# Altium PCB bootloader.PcbDoc
Units mm, origin at the board's own origin, x right, y up, seen from the top; angles counter-clockwise.
Board outline 152.4 x 101.6 mm, 2 copper layers (Top Layer, Bottom Layer); 40 components, 8 nets, 204 pads, 0 vias.
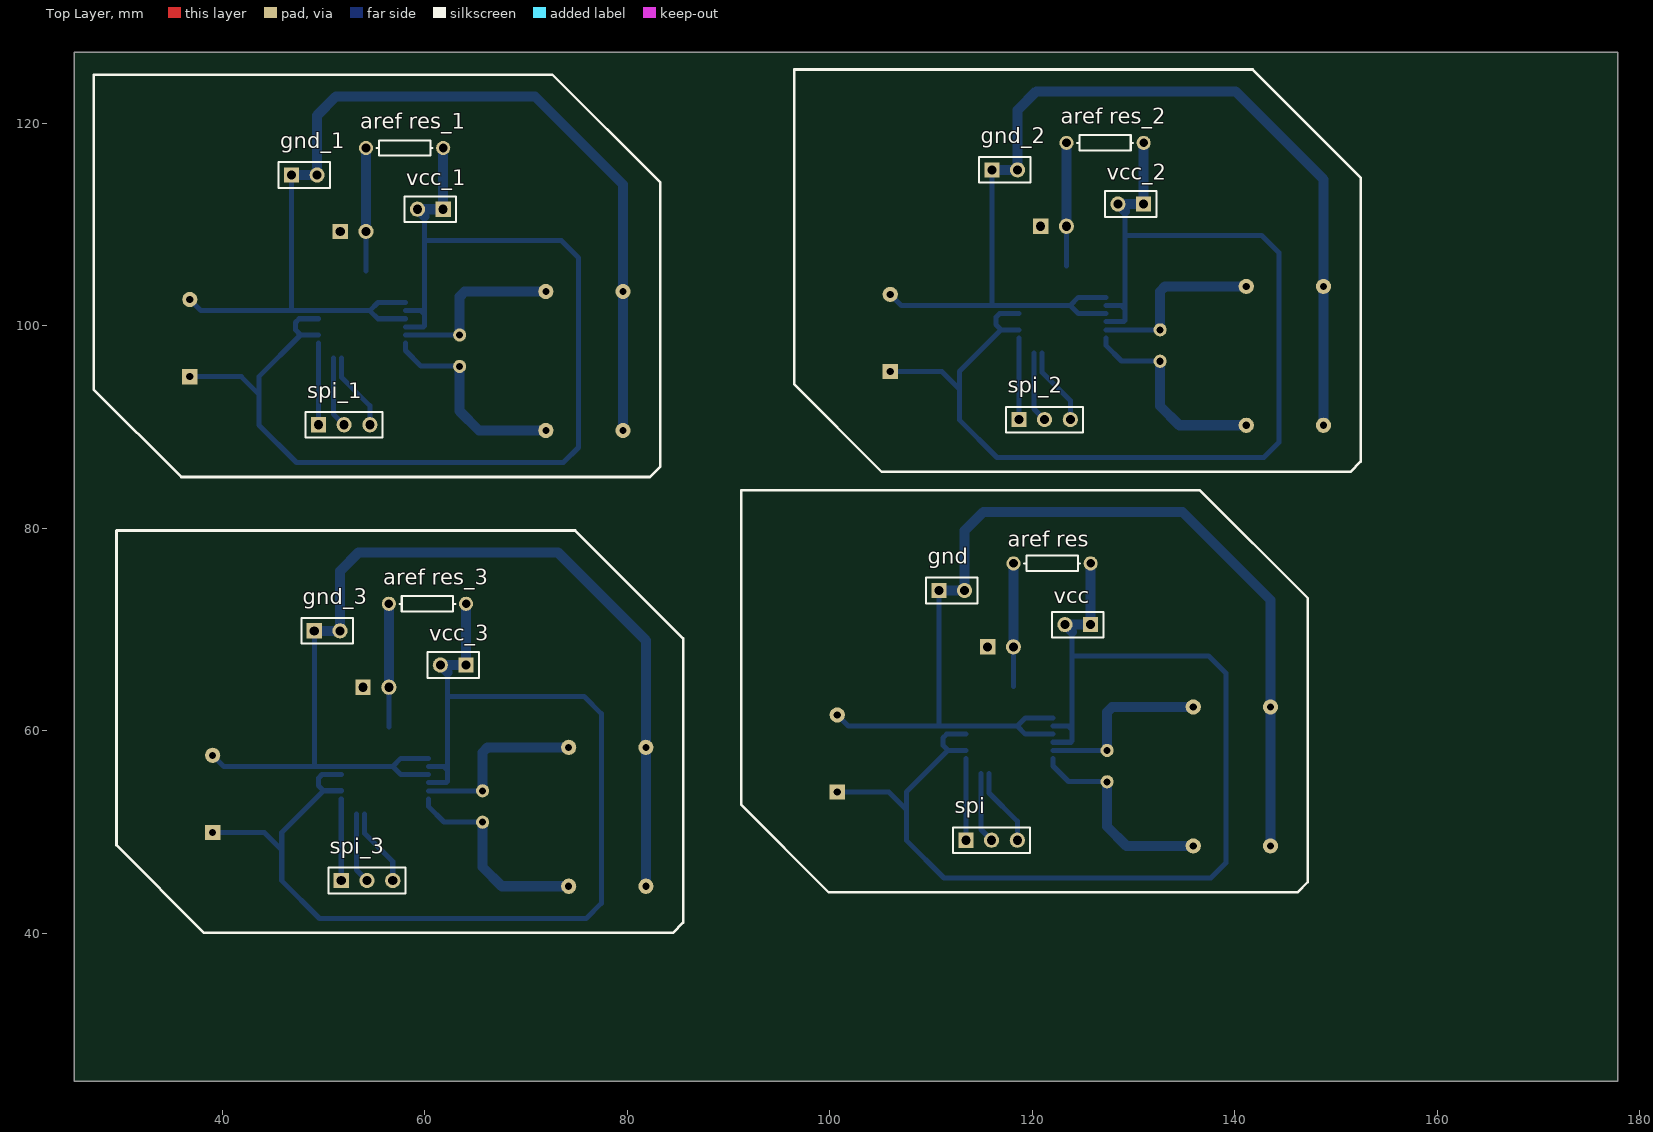
[diagram p0: Top Layer view]
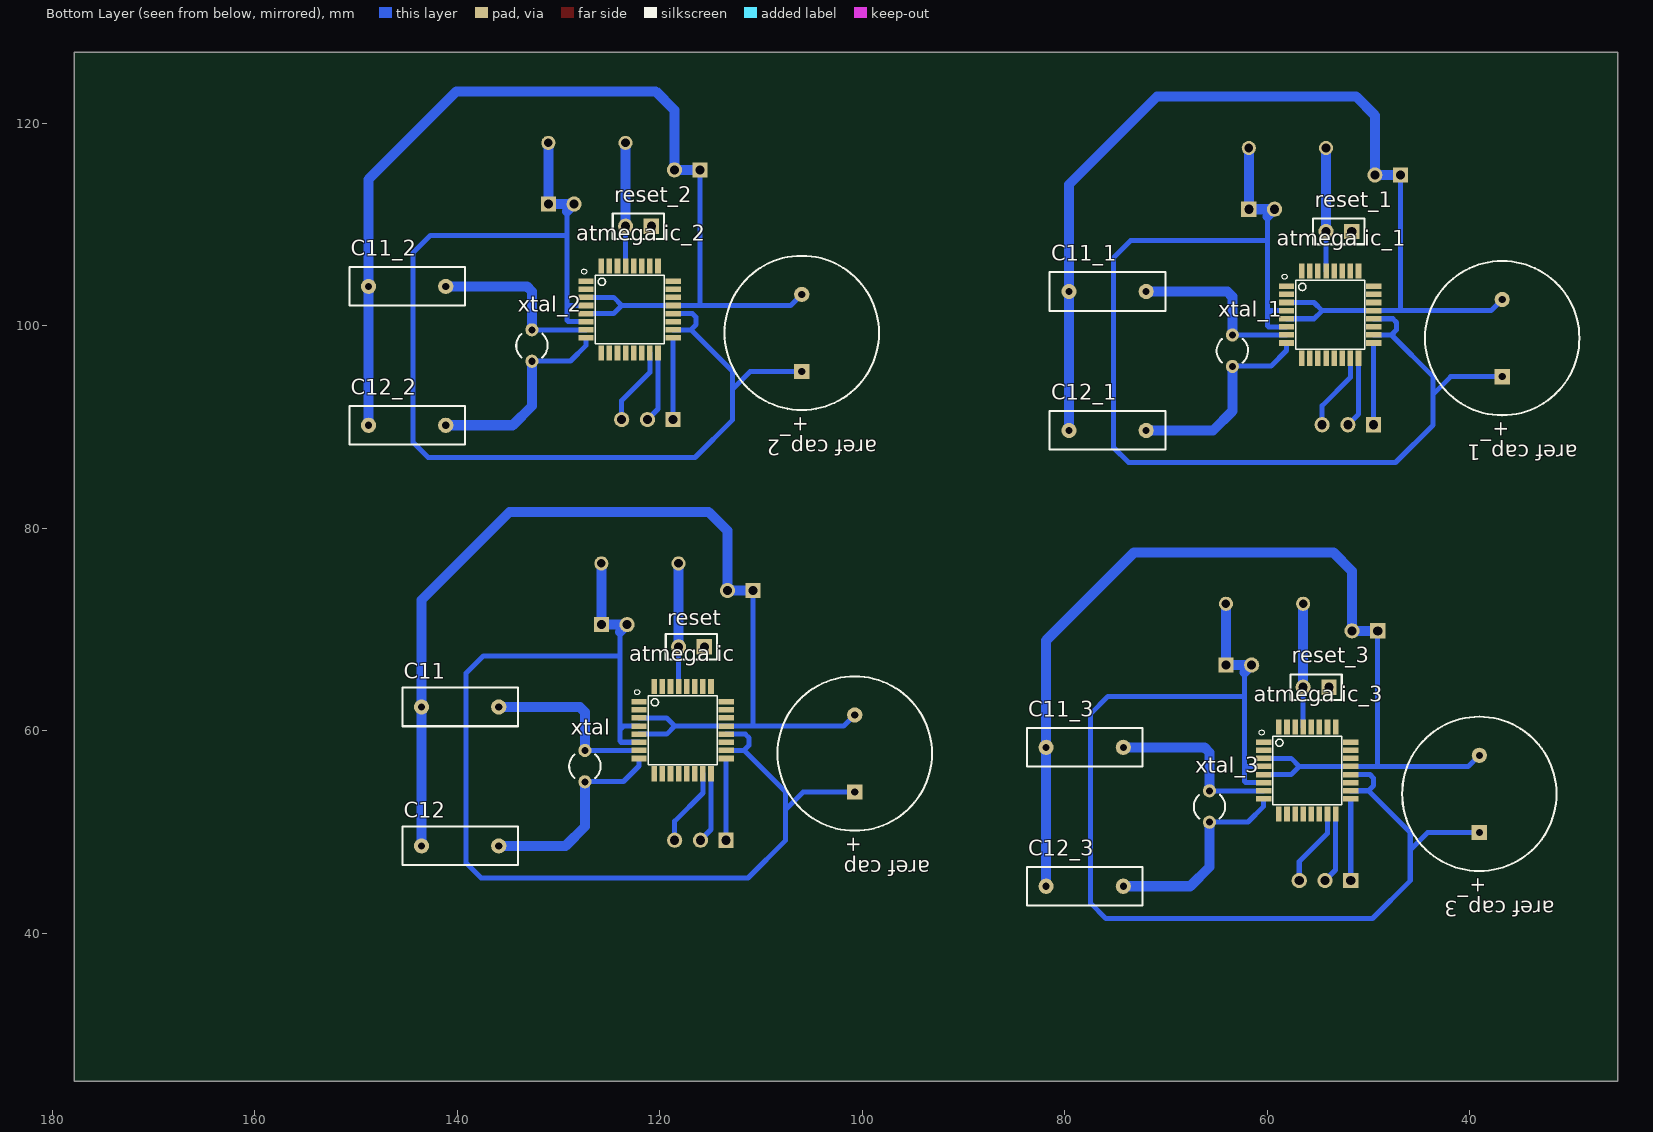
[diagram p1: Bottom Layer view, seen from below]

## Layer stack, top to bottom
Top Solder: solder mask 0.0102, Solder Resist, Dk 3.5
Top Layer: signal copper 0.0356
Dielectric 1: dielectric 0.32, FR-4, Dk 4.8
Bottom Layer: signal copper 0.0356
Bottom Solder: solder mask 0.0102, Solder Resist, Dk 3.5

## Board outline
25.4,25.4 177.8,25.4 177.8,127 25.4,127

## Design rules (kind name [scope] priority, off if disabled: settings)
Clearance Clearance_1 [All] p1: gap=0 ignorepadtopadclearanceinfootprint=FALSE
Clearance [All] p2: gap=3 ignorepadtopadclearanceinfootprint=FALSE
PolygonConnect [All] p1: connectstyle=Relief reliefconductorwidth=0.254 reliefentries=4 polygonreliefangle="90 Angle" airgapwidth=0.254
RoomDefinition bootloader [InComponentClass('bootloader')] p1: confinementstyle=ConfineIn formatcopy=TRUE lockcomponents=FALSE outline 178.943,26.924 244.729,26.924 244.729,45.72 178.943,45.72
RoutingVias [All] p1: holewidth=0.711 width=1.27 viastyle="Through Hole" minholewidth=0.711 minwidth=1.27 maxholewidth=0.711 maxwidth=1.27
SolderMaskExpansion [All] p1: expansion=0.102
Width [All] p1: maxlimit=0.254 minlimit=0.254 preferedwidth=0.254
30 further rules are at their usual default settings.

## Classes and differential pairs
component class bootloader: "aref res" C11 C12 gnd reset spi vcc xtal

## Components (designator, comment, footprint, x,y, rotation, side; value= is the part's Value field where it differs from the comment)
"aref cap" "Cap Pol1" RB7.6-15 100.736,57.76 r270 bottom value=47uf
"aref cap_1" "Cap Pol1" RB7.6-15 36.805,98.781 r270 bottom value=47uf (schematic designator "aref cap")
"aref cap_2" "Cap Pol1" RB7.6-15 105.969,99.289 r270 bottom value=47uf (schematic designator "aref cap")
"aref cap_3" "Cap Pol1" RB7.6-15 39.065,53.772 r270 bottom value=47uf (schematic designator "aref cap")
"aref res" "Res1" AXIAL-0.3 121.945,76.53 r180 top value="120 ohm"
"aref res_1" "Res1" AXIAL-0.3 58.014,117.551 r180 top value="120 ohm" (schematic designator "aref res")
"aref res_2" "Res1" AXIAL-0.3 127.178,118.059 r180 top value="120 ohm" (schematic designator "aref res")
"aref res_3" "Res1" AXIAL-0.3 60.274,72.542 r180 top value="120 ohm" (schematic designator "aref res")
"atmega ic" "ATMEGA328P-AU" *QFP80P900X900X120-32N 117.729,60.071 r180 bottom
"atmega ic_1" "ATMEGA328P-AU" *QFP80P900X900X120-32N 53.797,101.092 r180 bottom (schematic designator "atmega ic")
"atmega ic_2" "ATMEGA328P-AU" *QFP80P900X900X120-32N 122.961,101.6 r180 bottom (schematic designator "atmega ic")
"atmega ic_3" "ATMEGA328P-AU" *QFP80P900X900X120-32N 56.058,56.083 r180 bottom (schematic designator "atmega ic")
C11 "Cap" RAD-0.3 139.7,62.357 r180 bottom value=22pf
C11_1 "Cap" RAD-0.3 75.768,103.378 r180 bottom value=22pf (schematic designator C11)
C11_2 "Cap" RAD-0.3 144.932,103.886 r180 bottom value=22pf (schematic designator C11)
C11_3 "Cap" RAD-0.3 78.029,58.369 r180 bottom value=22pf (schematic designator C11)
C12 "Cap" RAD-0.3 139.7,48.641 r180 bottom value=22pf
C12_1 "Cap" RAD-0.3 75.768,89.662 r180 bottom value=22pf (schematic designator C12)
C12_2 "Cap" RAD-0.3 144.932,90.17 r180 bottom value=22pf (schematic designator C12)
C12_3 "Cap" RAD-0.3 78.029,44.653 r180 bottom value=22pf (schematic designator C12)
gnd "Header 2" HDR1X2 110.769,73.863 r0 top
gnd_1 "Header 2" HDR1X2 46.838,114.884 r0 top (schematic designator gnd)
gnd_2 "Header 2" HDR1X2 116.002,115.392 r0 top (schematic designator gnd)
gnd_3 "Header 2" HDR1X2 49.098,69.875 r0 top (schematic designator gnd)
reset "Header 2" HDR1X2 115.589,68.294 r0 bottom
reset_1 "Header 2" HDR1X2 51.657,109.315 r0 bottom (schematic designator reset)
reset_2 "Header 2" HDR1X2 120.821,109.823 r0 bottom (schematic designator reset)
reset_3 "Header 2" HDR1X2 53.918,64.306 r0 bottom (schematic designator reset)
spi "Header 3" HDR1X3 113.436,49.2 r0 top
spi_1 "Header 3" HDR1X3 49.505,90.221 r0 top (schematic designator spi)
spi_2 "Header 3" HDR1X3 118.669,90.729 r0 top (schematic designator spi)
spi_3 "Header 3" HDR1X3 51.765,45.212 r0 top (schematic designator spi)
vcc "+5v" HDR1X2 125.755,70.485 r180 top
vcc_1 "+5v" HDR1X2 61.824,111.506 r180 top (schematic designator vcc)
vcc_2 "+5v" HDR1X2 130.988,112.014 r180 top (schematic designator vcc)
vcc_3 "+5v" HDR1X2 64.084,66.497 r180 top (schematic designator vcc)
xtal "XTAL" R38 127.381,56.515 r180 bottom
xtal_1 "XTAL" R38 63.449,97.536 r180 bottom (schematic designator xtal)
xtal_2 "XTAL" R38 132.613,98.044 r180 bottom (schematic designator xtal)
xtal_3 "XTAL" R38 65.71,52.527 r180 bottom (schematic designator xtal)

## Footprints (in the part's own frame and the unit in brackets; to place one, negate y for a bottom-side part, rotate by r counter-clockwise, add the part's x,y. Pads: shape width x height; smd on the part's side, far side on the other; paste and mask are expansions set on the pad)
*QFP80P900X900X120-32N [mm]
  rect 1.5x0.55 smd: 1(-4.3,2.8) 2(-4.3,2) 3(-4.3,1.2) 4(-4.3,0.4) 5(-4.3,-0.4) 6(-4.3,-1.2) 7(-4.3,-2) 8(-4.3,-2.8) 17(4.3,-2.8) 18(4.3,-2) 19(4.3,-1.2) 20(4.3,-0.4) 21(4.3,0.4) 22(4.3,1.2) 23(4.3,2) 24(4.3,2.8)
  rect 0.55x1.5 smd: 9(-2.8,-4.3) 10(-2,-4.3) 11(-1.2,-4.3) 12(-0.4,-4.3) 13(0.4,-4.3) 14(1.2,-4.3) 15(2,-4.3) 16(2.8,-4.3) 25(2.8,4.3) 26(2,4.3) 27(1.2,4.3) 28(0.4,4.3) 29(-0.4,4.3) 30(-1.2,4.3) 31(-2,4.3) 32(-2.8,4.3)
  silkscreen extent -4.75,-3.4 3.4,4
AXIAL-0.3 [mm] "Axial Device, Thru-Hole; 2 Leads; 0.3 in Pin Spacing"
  round 1.4 hole 0.85: 1(-3.81,0) 2(3.81,0)
  silkscreen extent -2.77,-0.76 2.77,0.76
HDR1X2 [mm] "Connector; Header; 2 Position"
  rect 1.5x1.5 hole 0.9: 1(0,0)
  round 1.5 hole 0.9: 2(2.54,0)
  silkscreen extent -1.27,-1.27 3.81,1.27
HDR1X3 [mm] "Connector; Header; 3 Position"
  rect 1.5x1.5 hole 0.9: 1(0,0)
  round 1.5 hole 0.9: 2(2.54,0) 3(5.08,0)
  silkscreen extent -1.27,-1.27 6.35,1.27
R38 [mm] "Crystal, Thru-Hole; 2 Leads; Body 3.1 x 8.2 mm (Dia.xH)"
  round 1.3 hole 0.7: 1(0,1.55) 2(0,-1.55)
  silkscreen extent -1.55,-1.19 1.55,1.17
RAD-0.3 [mm] "Radial Cap, Thru-Hole; 2 Leads; 0.3 in Pin Spacing"
  round 1.5 hole 0.7: 1(-3.81,0) 2(3.81,0)
  silkscreen extent -5.71,-1.91 5.71,1.91
RB7.6-15 [mm] "Polarized Capacitor (Radial); 2 Leads"
  rect 1.5x1.5 hole 0.7: 1(3.81,0)
  round 1.5 hole 0.7: 2(-3.81,0)
  silkscreen extent -7.62,-7.62 7.62,7.62

## Part data
"aref cap" "aref cap_1" "aref cap_2" "aref cap_3": "Polarized Capacitor (Radial)", LatestRevisionDate=17-Jul-2002, LatestRevisionNote="Re-released for DXP Platform.", PackageDescription="Polarized Capacitor (Radial); 2 Leads", PackageReference=RB7.6-15, Published=8-Jun-2000, Publisher="Altium Limited"
"aref res" "aref res_1" "aref res_2" "aref res_3": "Resistor", LatestRevisionDate=17-Jul-2002, LatestRevisionNote="Re-released for DXP Platform.", PackageDescription="Axial Device, Thru-Hole; 2 Leads; 0.3 in Pin Spacing", PackageReference=AXIAL-0.3, Published=8-Jun-2000, Publisher="Altium Limited"
"atmega ic" "atmega ic_1" "atmega ic_2" "atmega ic_3": "Microcontroller Mcu, 8 Bit, Atmega, 20mhz, Tqfp-32", Package="TQFP-32 Microchip", Digi-Key_Part_Number=ATMEGA328P-AU-ND, Digi-Key_Purchase_URL=https://www.digikey.com/product-detail/en/microchip-technology/ATMEGA328P-AU/ATMEGA328P-AU-ND/1832260?utm_source=snapeda&utm_medium=aggregator&utm_campaign=symbol, MF=Microchip, MP=ATMEGA328P-AU, SnapEDA_Link=https://www.snapeda.com/parts/ATMEGA328P-AU/Microchip/view-part/?ref=snap
C11 C11_1 C11_2 C11_3 C12 C12_1 C12_2 C12_3: "Capacitor", LatestRevisionDate=17-Jul-2002, LatestRevisionNote="Re-released for DXP Platform.", PackageDescription="Radial Cap, Thru-Hole; 2 Leads; 0.3 in Pin Spacing", PackageReference=RAD-0.3, Published=8-Jun-2000, Publisher="Altium Limited"
gnd gnd_1 gnd_2 gnd_3 reset reset_1 reset_2 reset_3: "Header, 2-Pin", LatestRevisionDate=17-Jul-2002, LatestRevisionNote="Re-released for DXP Platform.", Publisher="Altium Limited"
spi spi_1 spi_2 spi_3: "Header, 3-Pin", LatestRevisionDate=17-Jul-2002, LatestRevisionNote="Re-released for DXP Platform.", Publisher="Altium Limited"
vcc vcc_1 vcc_2 vcc_3: library part "Header 2", "Header, 2-Pin", LatestRevisionDate=17-Jul-2002, LatestRevisionNote="Re-released for DXP Platform.", Publisher="Altium Limited"
xtal xtal_1 xtal_2 xtal_3: "Crystal Oscillator", LatestRevisionDate=17-Jul-2002, LatestRevisionNote="Re-released for DXP Platform.", PackageDescription="Crystal, Thru-Hole; 2 Leads; Body 3.1 x 8.2 mm (Dia.xH)", PackageReference=R38, Published=8-Jun-2000, Publisher="Altium Limited"

## Nets (pads, with @x,y where several pads share a name; then routed paths per layer and width w, separated by ;. In a path a pad name is that pad's centre, name@x,y a point inside that pad or via, vN(x,y) a via of type N, cw(c..) or ccw(c..) an arc to the next point about the centre after c; other vN are vias at no path point)
"Netaref cap_1": "aref cap.1" "aref res.1" "atmega ic.4" "atmega ic.6" "atmega ic.18" "atmega ic.20" vcc.1 vcc.2 | length 116.5
  Bottom Layer w0.254: 122.029,58.871 122.035,58.877 ; 123.819,58.871 123.927,58.979
  Bottom Layer w0.5: 100.736,53.95 105.829,53.95 107.556,52.222 ; 113.429,58.071 111.677,58.071 ; 113.429,59.671 111.538,59.671 111.176,59.309 111.176,58.572 111.677,58.071 ; 122.029,58.871 123.819,58.871 ; 122.029,60.471 123.552,60.471 123.927,60.096 ; 123.927,58.979 123.927,60.096 ; 123.927,69.774 123.927,67.386 ; 107.556,52.222 107.556,49.188 111.277,45.466 137.617,45.466 139.116,46.965 139.116,65.684 137.414,67.386 123.927,67.386 ; 107.556,52.222 107.556,53.95 111.677,58.071 ; 123.927,60.096 123.927,67.386
  Bottom Layer w1: 123.927,69.774 vcc.2 vcc.1 125.755,76.53
"Netaref cap_2": "aref cap.2" "atmega ic.3" "atmega ic.5" "atmega ic.21" C11.1 C12.1 gnd.1 gnd.2 | length 106.7
  Bottom Layer w0.254: 110.769,60.439 110.769,60.471 ; 122.029,61.271 122.099,61.341
  Bottom Layer w0.5: 100.736,61.57 101.835,60.471 110.769,60.471 ; gnd.1 110.769,60.471 ; 122.029,59.671 119.31,59.671 118.51,60.471 ; 122.029,61.271 119.31,61.271 118.51,60.471 ; 110.769,60.471 113.429,60.471 118.51,60.471
  Bottom Layer w1: gnd.1 gnd.2 113.309,79.756 115.164,81.61 134.823,81.61 143.51,72.923 C11.1 C12.1
"Netaref res_2": "aref res.2" "atmega ic.29" reset.2 | length 12.3
  Bottom Layer w0.254: reset.2 reset.2@118.135,68.301 ; 118.135,76.886 118.212,76.81
  Bottom Layer w0.5: 118.129,64.371 reset.2
  Bottom Layer w1: reset.2@118.135,68.301 118.135,76.53
"Netatmega ic_7": "atmega ic.7" C11.2 xtal.1 | length 17.9
  Bottom Layer w0.254: 122.029,58.071 122.035,58.065
  Bottom Layer w0.5: 122.035,58.065 xtal.1
  Bottom Layer w1: xtal.1 127.381,61.849 127.889,62.357 C11.2
"Netatmega ic_8": "atmega ic.8" C12.2 xtal.2 | length 20.5
  Bottom Layer w0.254: xtal.2@127.355,54.991 xtal.2
  Bottom Layer w0.5: 122.029,57.271 122.029,56.533 123.571,54.991 xtal.2@127.355,54.991
  Bottom Layer w1: xtal.2 127.381,50.546 129.286,48.641 C12.2
"Netatmega ic_15": "atmega ic.15" spi.3 | length 7.7
  Bottom Layer w0.5: 115.729,55.771 115.729,53.867 118.516,51.079 spi.3
"Netatmega ic_16": "atmega ic.16" spi.2 | length 7
  Bottom Layer w0.5: 114.929,55.771 114.929,50.247 spi.2
"Netatmega ic_17": "atmega ic.17" spi.1 | length 8.1
  Bottom Layer w0.254: spi.1@113.429,49.207 spi.1
  Bottom Layer w0.5: spi.1@113.429,49.207 113.429,57.271
pads on no net: "aref cap_1.1" "aref cap_1.2" "aref cap_2.1" "aref cap_2.2" "aref cap_3.1" "aref cap_3.2" "aref res_1.1" "aref res_1.2" "aref res_2.1" "aref res_2.2" "aref res_3.1" "aref res_3.2" "atmega ic.1" "atmega ic.2" "atmega ic.9" "atmega ic.10" "atmega ic.11" "atmega ic.12" "atmega ic.13" "atmega ic.14" "atmega ic.19" "atmega ic.22" "atmega ic.23" "atmega ic.24" "atmega ic.25" "atmega ic.26" "atmega ic.27" "atmega ic.28" "atmega ic.30" "atmega ic.31" "atmega ic.32" "atmega ic_1.1" "atmega ic_1.2" "atmega ic_1.3" "atmega ic_1.4" "atmega ic_1.5" "atmega ic_1.6" "atmega ic_1.7" "atmega ic_1.8" "atmega ic_1.9" "atmega ic_1.10" "atmega ic_1.11" "atmega ic_1.12" "atmega ic_1.13" "atmega ic_1.14" "atmega ic_1.15" "atmega ic_1.16" "atmega ic_1.17" "atmega ic_1.18" "atmega ic_1.19" "atmega ic_1.20" "atmega ic_1.21" "atmega ic_1.22" "atmega ic_1.23" "atmega ic_1.24" "atmega ic_1.25" "atmega ic_1.26" "atmega ic_1.27" "atmega ic_1.28" "atmega ic_1.29" "atmega ic_1.30" "atmega ic_1.31" "atmega ic_1.32" "atmega ic_2.1" "atmega ic_2.2" "atmega ic_2.3" "atmega ic_2.4" "atmega ic_2.5" "atmega ic_2.6" "atmega ic_2.7" "atmega ic_2.8" "atmega ic_2.9" "atmega ic_2.10" "atmega ic_2.11" "atmega ic_2.12" "atmega ic_2.13" "atmega ic_2.14" "atmega ic_2.15" "atmega ic_2.16" "atmega ic_2.17" "atmega ic_2.18" "atmega ic_2.19" "atmega ic_2.20" "atmega ic_2.21" "atmega ic_2.22" "atmega ic_2.23" "atmega ic_2.24" "atmega ic_2.25" "atmega ic_2.26" "atmega ic_2.27" "atmega ic_2.28" "atmega ic_2.29" "atmega ic_2.30" "atmega ic_2.31" "atmega ic_2.32" "atmega ic_3.1" "atmega ic_3.2" "atmega ic_3.3" "atmega ic_3.4" "atmega ic_3.5" "atmega ic_3.6" "atmega ic_3.7" "atmega ic_3.8" "atmega ic_3.9" "atmega ic_3.10" "atmega ic_3.11" "atmega ic_3.12" "atmega ic_3.13" "atmega ic_3.14" "atmega ic_3.15" "atmega ic_3.16" "atmega ic_3.17" "atmega ic_3.18" "atmega ic_3.19" "atmega ic_3.20" "atmega ic_3.21" "atmega ic_3.22" "atmega ic_3.23" "atmega ic_3.24" "atmega ic_3.25" "atmega ic_3.26" "atmega ic_3.27" "atmega ic_3.28" "atmega ic_3.29" "atmega ic_3.30" "atmega ic_3.31" "atmega ic_3.32" C11_1.1 C11_1.2 C11_2.1 C11_2.2 C11_3.1 C11_3.2 C12_1.1 C12_1.2 C12_2.1 C12_2.2 C12_3.1 C12_3.2 gnd_1.1 gnd_1.2 gnd_2.1 gnd_2.2 gnd_3.1 gnd_3.2 reset.1 reset_1.1 reset_1.2 reset_2.1 reset_2.2 reset_3.1 reset_3.2 spi_1.1 spi_1.2 spi_1.3 spi_2.1 spi_2.2 spi_2.3 spi_3.1 spi_3.2 spi_3.3 vcc_1.1 vcc_1.2 vcc_2.1 vcc_2.2 vcc_3.1 vcc_3.2 xtal_1.1 xtal_1.2 xtal_2.1 xtal_2.2 xtal_3.1 xtal_3.2
copper on no net: | length 889.7
  Bottom Layer w0.254: 46.838,101.46 46.838,101.492 ; 49.098,56.452 49.098,56.483 ; 49.497,90.228 49.505,90.221 ; 51.758,45.219 51.765,45.212 ; 54.197,109.315 54.204,109.322 ; 54.204,117.907 54.28,117.831 ; 56.458,64.306 56.464,64.313 ; 56.464,72.898 56.54,72.822 ; 58.097,99.092 58.103,99.086 ; 58.097,99.892 58.103,99.898 ; 58.097,102.292 58.167,102.362 ; 59.887,99.892 59.995,100 ; 60.358,54.083 60.364,54.077 ; 60.358,54.883 60.364,54.889 ; 60.358,57.283 60.428,57.353 ; 62.148,54.883 62.255,54.991 ; 63.423,96.012 63.449,95.986 ; 65.684,51.003 65.71,50.977 ; 116.002,101.968 116.002,102 ; 118.661,90.736 118.669,90.729 ; 123.361,109.823 123.368,109.83 ; 123.368,118.415 123.444,118.339 ; 127.261,99.6 127.267,99.594 ; 127.261,100.4 127.268,100.406 ; 127.261,102.8 127.331,102.87 ; 129.051,100.4 129.159,100.508 ; 132.587,96.52 132.613,96.494
  Bottom Layer w0.5: 36.805,94.971 41.897,94.971 43.624,93.243 ; 36.805,102.591 37.903,101.492 46.838,101.492 ; 39.065,49.962 44.157,49.962 45.885,48.235 ; 39.065,57.582 40.164,56.483 49.098,56.483 ; 46.838,114.884 46.838,101.492 ; 49.098,69.875 49.098,56.483 ; 49.497,90.228 49.497,98.292 ; 49.497,99.092 47.745,99.092 ; 49.497,100.692 47.606,100.692 47.244,100.33 47.244,99.593 47.745,99.092 ; 50.997,96.792 50.997,91.268 52.045,90.221 ; 51.758,45.219 51.758,53.283 ; 51.758,54.083 50.006,54.083 ; 51.758,55.683 49.867,55.683 49.505,55.321 49.505,54.585 50.006,54.083 ; 51.797,96.792 51.797,94.888 54.585,92.1 54.585,90.221 ; 53.258,51.783 53.258,46.259 54.305,45.212 ; 54.058,51.783 54.058,49.879 56.845,47.092 56.845,45.212 ; 54.197,105.392 54.197,109.315 ; 56.458,60.383 56.458,64.306 ; 58.097,98.292 58.097,97.554 59.639,96.012 63.423,96.012 ; 58.097,99.892 59.887,99.892 ; 58.097,100.692 55.378,100.692 54.578,101.492 ; 58.097,101.492 59.62,101.492 59.995,101.117 ; 58.097,102.292 55.378,102.292 54.578,101.492 ; 58.103,99.086 63.449,99.086 ; 59.995,100 59.995,101.117 ; 59.995,110.795 59.995,108.407 ; 60.358,53.283 60.358,52.545 61.9,51.003 65.684,51.003 ; 60.358,54.883 62.148,54.883 ; 60.358,55.683 57.639,55.683 56.839,56.483 ; 60.358,56.483 61.881,56.483 62.255,56.109 ; 60.358,57.283 57.639,57.283 56.839,56.483 ; 60.364,54.077 65.71,54.077 ; 62.255,54.991 62.255,56.109 ; 62.255,65.786 62.255,63.398 ; 105.969,95.479 111.061,95.479 112.788,93.751 ; 105.969,103.099 107.067,102 116.002,102 ; 116.002,115.392 116.002,102 ; 118.661,90.736 118.661,98.8 ; 118.661,99.6 116.91,99.6 ; 118.661,101.2 116.77,101.2 116.408,100.838 116.408,100.101 116.91,99.6 ; 120.161,97.3 120.161,91.776 121.209,90.729 ; 120.961,97.3 120.961,95.396 123.749,92.608 123.749,90.729 ; 123.361,105.9 123.361,109.823 ; 127.261,98.8 127.261,98.062 128.803,96.52 132.587,96.52 ; 127.261,100.4 129.051,100.4 ; 127.261,101.2 124.542,101.2 123.742,102 ; 127.261,102 128.784,102 129.159,101.625 ; 127.261,102.8 124.542,102.8 123.742,102 ; 127.267,99.594 132.613,99.594 ; 129.159,100.508 129.159,101.625 ; 129.159,111.303 129.159,108.915 ; 43.624,93.243 43.624,94.971 47.745,99.092 ; 43.624,93.243 43.624,90.209 47.346,86.487 73.685,86.487 75.184,87.986 75.184,106.705 73.482,108.407 59.995,108.407 ; 45.885,48.235 45.885,49.962 50.006,54.083 ; 45.885,48.235 45.885,45.2 49.606,41.478 75.946,41.478 77.445,42.977 77.445,61.697 75.743,63.398 62.255,63.398 ; 46.838,101.492 49.497,101.492 54.578,101.492 ; 49.098,56.483 51.758,56.483 56.839,56.483 ; 59.995,101.117 59.995,108.407 ; 62.255,56.109 62.255,63.398 ; 112.788,93.751 112.788,95.479 116.91,99.6 ; 112.788,93.751 112.788,90.717 116.51,86.995 142.85,86.995 144.348,88.494 144.348,107.213 142.646,108.915 129.159,108.915 ; 116.002,102 118.661,102 123.742,102 ; 129.159,101.625 129.159,108.915
  Bottom Layer w1: 46.838,114.884 49.378,114.884 49.378,120.777 51.232,122.631 70.891,122.631 79.578,113.944 79.578,103.378 79.578,89.662 ; 49.098,69.875 51.638,69.875 51.638,75.768 53.492,77.622 73.152,77.622 81.839,68.936 81.839,58.369 81.839,44.653 ; 54.204,109.322 54.204,117.551 ; 56.464,64.313 56.464,72.542 ; 59.995,110.795 59.284,111.506 61.824,111.506 61.824,117.551 ; 62.255,65.786 61.544,66.497 64.084,66.497 64.084,72.542 ; 63.449,95.986 63.449,91.567 65.354,89.662 71.958,89.662 ; 63.449,99.086 63.449,102.87 63.957,103.378 71.958,103.378 ; 65.71,50.977 65.71,46.558 67.615,44.653 74.219,44.653 ; 65.71,54.077 65.71,57.861 66.218,58.369 74.219,58.369 ; 116.002,115.392 118.542,115.392 118.542,121.285 120.396,123.139 140.056,123.139 148.742,114.452 148.742,103.886 148.742,90.17 ; 123.368,109.83 123.368,118.059 ; 129.159,111.303 128.448,112.014 130.988,112.014 130.988,118.059 ; 132.613,96.494 132.613,92.075 134.518,90.17 141.122,90.17 ; 132.613,99.594 132.613,103.378 133.121,103.886 141.122,103.886

## Silkscreen, mask and mechanical layers (free items; w line width, h text height)
Top Overlay:
  lines w0.254: 28.778,124.79 72.593,124.79 83.261,114.122 83.261,86.081 82.245,85.065 35.966,85.065 27.305,93.726 27.305,123.317 27.305,124.79 29.413,124.79 ; 31.039,79.781 74.854,79.781 85.522,69.113 85.522,41.072 84.506,40.056 38.227,40.056 29.566,48.717 29.566,78.308 29.566,79.781 31.674,79.781 ; 92.71,83.769 136.525,83.769 147.193,73.101 147.193,45.06 146.177,44.044 99.898,44.044 91.237,52.705 91.237,82.296 91.237,83.769 93.345,83.769 ; 97.942,125.298 141.757,125.298 152.425,114.63 152.425,86.589 151.409,85.573 105.131,85.573 96.469,94.234 96.469,123.825 96.469,125.298 98.577,125.298

## Text inside footprints (layer, text, board x,y; h text height)
"aref cap": Bottom Overlay "+" at 101.473,49.628 h1.5 r90
"aref cap_1": Bottom Overlay "+" at 37.541,90.649 h1.5 r90
"aref cap_2": Bottom Overlay "+" at 106.706,91.157 h1.5 r90
"aref cap_3": Bottom Overlay "+" at 39.802,45.64 h1.5 r90